# Altium PCB Jump Starter.PcbDoc (part 2 of 2)
Units mm, origin at the board's own origin, x right, y up, seen from the top; angles counter-clockwise.
Board outline 188.98 x 144.65 mm, 2 copper layers (Top Layer, Bottom Layer), stack 1.671 mm thick; 96 components, 60 nets, 320 pads, 764 vias.
Unrouted connection lines stored in the file: 5.
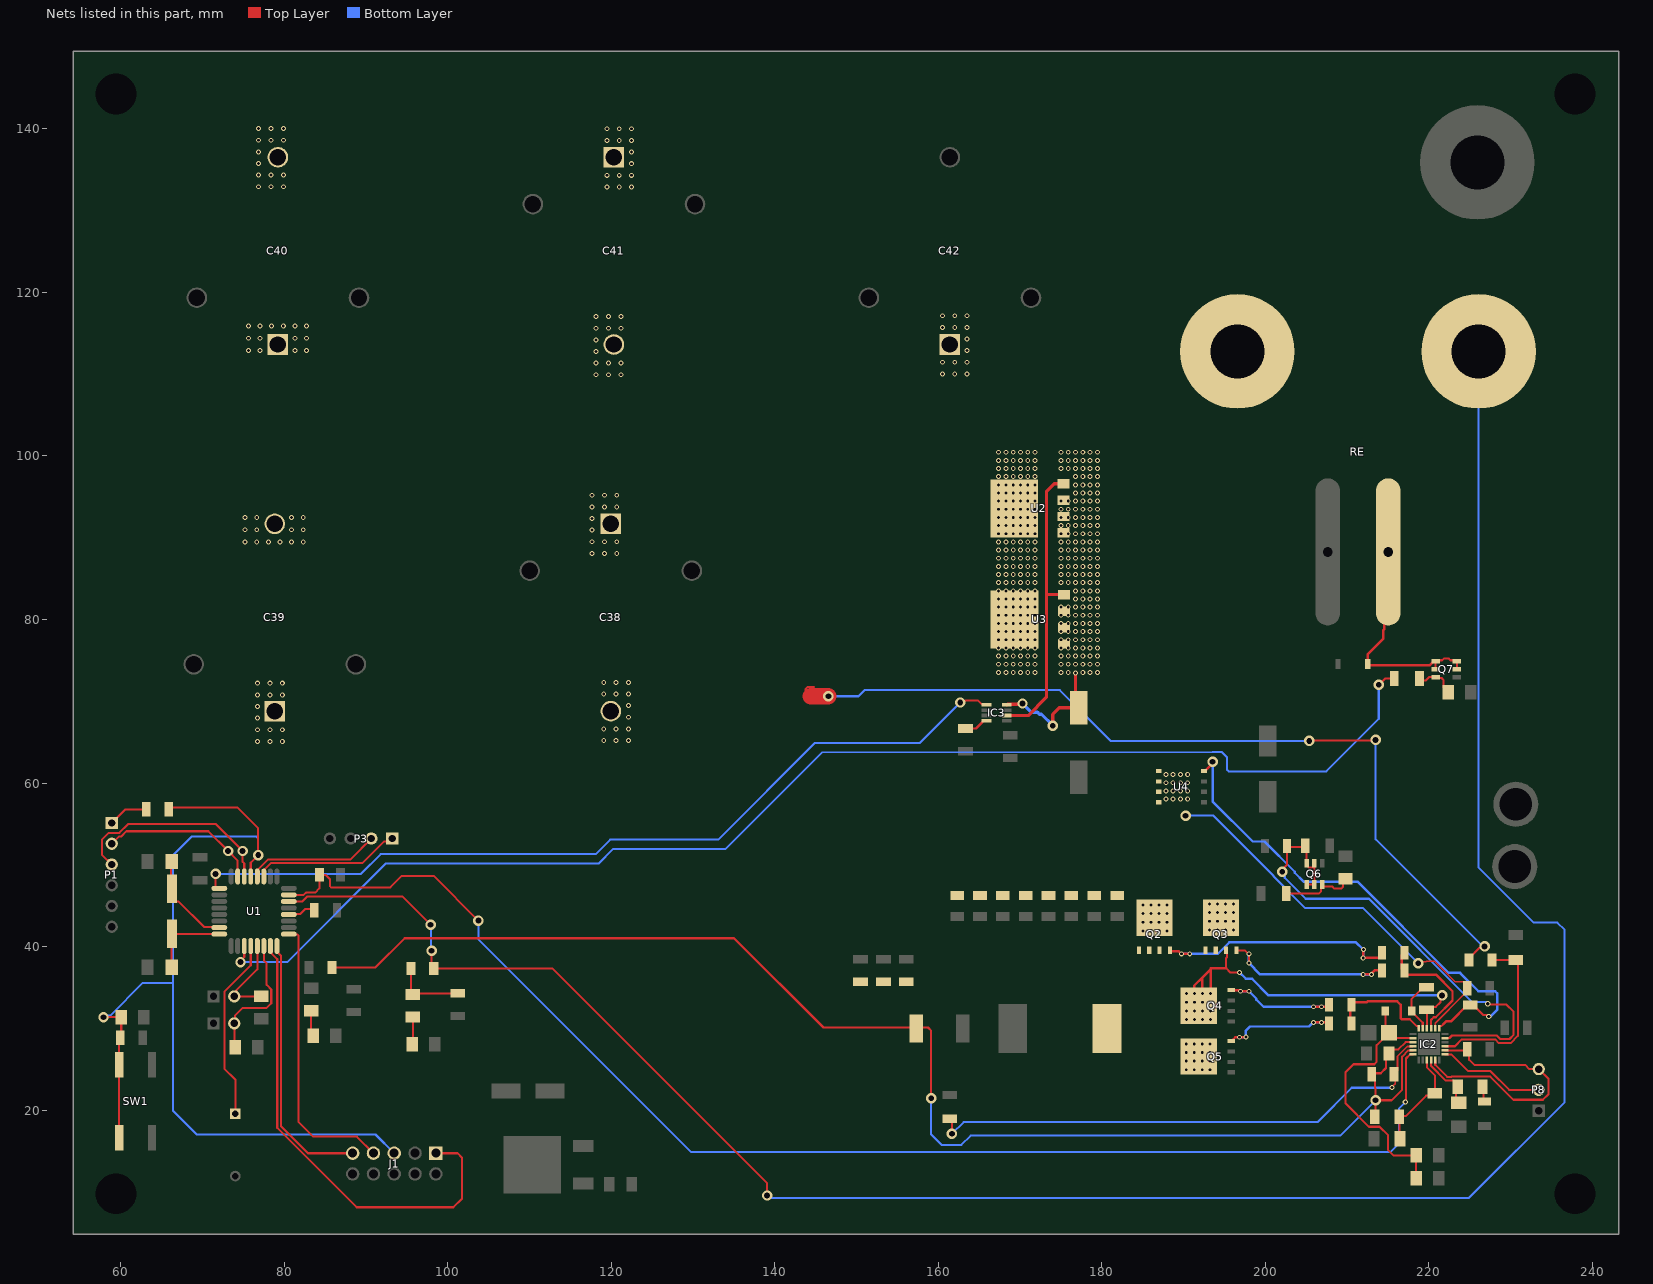
[diagram p2: the nets of this part, all layers, seen from the top]

## Via types
v1: diameter 0.6, hole 0.35, Top Layer to Bottom Layer, 576 vias
v2: diameter 0.6, hole 0.35, Top Layer to Bottom Layer, tented both sides, 128 vias
v3: diameter 1.27, hole 0.711, Top Layer to Bottom Layer, 53 vias
v4: diameter 0.65, hole 0.4, Top Layer to Bottom Layer, 7 vias

## Nets (pads, with @x,y where several pads share a name; then routed paths per layer and width w, separated by ;. In a path a pad name is that pad's centre, name@x,y a point inside that pad or via, vN(x,y) a via of type N, cw(c..) or ccw(c..) an arc to the next point about the centre after c; other vN are vias at no path point) (continued)
ISMON: C15.2 IC2.6 U1.23 | length 167
  Top Layer w0.254: U1.23@80.577,46.323 82.394,46.323 82.676,46.605 83.81,46.605 84.322,47.117 C15.2@84.322,48.768 84.338,48.751 85.107,48.751 85.598,48.26 85.598,47.393 85.747,47.244 92.996,47.244 94.393,48.641 98.298,48.641 v3(103.759,43.18) ; v4(217.124,20.988) 217.194,21.058 217.194,26.313 217.671,26.79 218.036,26.79 IC2.6@218.059,26.813
  Bottom Layer w0.254: v3(103.759,43.18) 103.759,40.894 129.794,14.859 215.265,14.859 216.358,15.952 216.358,20.209 217.124,20.976 v4(217.124,20.988)
MISO: J1.9 U1.16 | length 32.4
  Top Layer w0.254: U1.16@79.127,40.073 79.127,39.398 79.629,38.896 79.629,18.034 82.931,14.732 J1.9@88.392,14.732
MOSFET_GATE: IC3.6 U2.4 U3.4 | length 35.6
  Top Layer w0.254: 170.989,68.255 170.994,68.251
  Top Layer w0.4: IC3.6@168.382,68.255 170.989,68.255 ; 170.994,68.251 173.228,70.485 173.228,83.058 ; U2.4@175.336,96.599 174.196,96.599 173.228,95.631 173.228,83.058 ; U3.4@175.374,83.01 175.326,83.058 173.228,83.058
MOSFET_GATE_DRIVER: IC3.1 U1.1 | length 105.4
  Top Layer w0.254: v3(71.628,48.895) 71.628,47.283 71.788,47.123 U1.1@72.077,47.123 ; v3(162.687,69.85) 162.881,70.044 163.284,70.044 163.344,70.104 164.846,70.104 165.297,69.653 165.784,69.653 IC3.1@165.882,69.555
  Bottom Layer w0.254: v3(71.628,48.895) 89.408,48.895 91.821,51.308 118.11,51.308 119.888,53.086 133.096,53.086 144.907,64.897 155.216,64.897 155.321,64.897 157.734,64.897 v3(162.687,69.85)
MOSI: J1.1 U1.15 | length 58.1
  Top Layer w0.254: U1.15@78.327,40.073 78.327,39.304 78.49,39.141 78.49,39.134 79.165,38.459 79.165,17.842 88.879,8.128 100.711,8.128 101.758,9.175 101.758,14.193 101.219,14.732 J1.1@98.552,14.732
NetC2_1: C2.1 U1.20 | length 3.5
  Top Layer w0.254: U1.20@80.577,43.923 80.704,43.923 80.77,43.989 81.977,43.989 82.565,44.577 83.583,44.577 C2.1@83.71,44.45
NetC3_2: C3.2 U1.7 Y1.2 | length 11.8
  Top Layer w0.254: C3.2@66.246,50.419 66.167,50.34 66.167,47.2 Y1.2@66.294,47.073 66.294,45.979 66.767,45.506 67.108,45.506 70.225,42.389 72.011,42.389 U1.7@72.077,42.323
NetC4_2: C4.2 U1.8 Y1.1 | length 9.9
  Top Layer w0.254: C4.2@66.246,37.465 66.246,41.525 Y1.1@66.294,41.573 66.344,41.523 U1.8@72.077,41.523
NetC8_2: C8.2 P1.1 | length 4.9
  Top Layer w0.254: P1.1@58.928,55.118 60.579,56.769 C8.2@63.136,56.769
NetC9_2: C9.2 IC2.4 R27.2 | length 64.8
  Top Layer w0.203: R27.2@161.417,18.957 161.671,18.703 v3(161.671,17.105) ; v4(215.49,22.762) 215.49,22.831 215.9,23.241 215.9,24.22 C9.2@215.736,24.384 216.154,24.802 216.154,26.58 217.349,27.775 218.021,27.775 IC2.4@218.059,27.813
  Bottom Layer w0.254: v3(161.671,17.105) 163.108,18.542 206.375,18.542 210.566,22.733 215.46,22.733 v4(215.49,22.762)
NetC13_1: C13.1 IC2.10 R9.1 | length 7.3
  Top Layer w0.254: IC2.10@220.259,26.113 220.272,26.1 220.272,25.392 222.054,23.61 223.021,23.61 223.519,23.112 R9.1@223.519,22.86 223.319,22.66 223.319,21.235 C13.1@223.647,20.907
NetC14_1: C14.1 R9.2 | length 2
  Top Layer w0.254: R9.2@226.569,22.86 226.695,22.734 226.695,21.085 C14.1@226.822,20.958
NetC16_1: C16.1 IC2.9 R12.2 R13.1 | length 12.7
  Top Layer w0.254: R12.2@216.459,16.51 216.383,16.586 R13.1@216.383,19.177 216.472,19.266 217.153,19.266 219.661,21.774 220.423,21.774 C16.1@220.726,22.077 220.726,24.257 219.79,25.193 219.79,25.487 219.764,25.513 219.764,26.108 IC2.9@219.759,26.113
NetC18_1: C18.1 IC2.19 U4.4 | length 62.5
  Top Layer w0.254: IC2.19@221.259,30.013 221.259,30.288 221.282,30.311 221.557,30.311 221.771,30.525 ; C18.1@224.684,32.856 C18.1@225.044,32.856 225.404,32.856 226.612,31.648 227.113,31.648 v4(227.308,31.453)
  Top Layer w0.3: U4.4@192.508,61.468 192.61,61.468 193.354,62.212 193.354,62.544 193.421,62.611 v3(193.548,62.611) ; 221.771,30.525 222.107,30.861 222.689,30.861 C18.1@224.684,32.856
  Bottom Layer w0.3: v3(193.548,62.611) 193.548,57.755 198.454,52.849 199.892,52.849 203.589,49.152 203.589,49.025 204.671,47.943 211.266,47.943 222.424,36.784 223.82,36.784 226.06,34.544 228.092,34.544 228.346,34.29 228.346,32.258 227.541,31.453 v4(227.308,31.453)
NetC21_1: C21.1 D2.1 IC2.23 | length 6.4
  Top Layer w0.254: IC2.23@219.246,30.226 219.246,30.686 217.881,32.051 D2.1@217.881,32.131 217.881,33.601 219.325,35.045 C21.1@219.71,35.045
NetC21_2: C21.2 IC2.22 L1.1 Q2.1 Q2.2 Q2.3 Q3.1 Q3.2 Q3.3 Q4.5-6-7-8 Q5.5-6-7-8 | length 47.3
  Top Layer w0.254: Q3.3@195.199,39.553 195.322,39.43 195.322,38.713 195.326,38.709 195.199,38.582 195.199,37.338 195.707,36.83 ; IC2.22@219.759,30.026 219.759,32.216 C21.2@219.71,32.265 220.078,32.633 220.847,32.633 221.421,33.207 221.421,33.842 v3(221.615,34.036)
  Top Layer w0.3: Q4.5-6-7-8@191.3,33.275 191.347,33.228 v1(191.347,33.189) 191.77,32.766 Q4.5-6-7-8@191.871,32.766 ; Q4.5-6-7-8@191.3,34.165 191.3,35.225 192.297,36.222 ; Q4.5-6-7-8@192.297,34.165 192.297,36.222 ; Q4.5-6-7-8@193.294,34.165 193.294,37.373 ; 193.412,37.338 192.297,36.222 ; 193.412,37.373 195.199,37.373 ; 195.707,36.83 v1(196.85,36.83)
  Bottom Layer w0.3: v1(196.85,36.83) 197.612,36.068 198.374,36.068 200.406,34.036 v3(221.615,34.036)
  other v1: 190.331,24.934 191.304,24.934 192.278,24.934 193.252,24.934 190.331,25.993 191.304,25.993 192.278,25.993 193.252,25.993 190.331,27.051 191.304,27.051 192.278,27.051 193.252,27.051 190.331,28.109 191.304,28.109 192.278,28.109 193.252,28.109 190.373,31.073 191.347,31.073 192.32,31.073 193.294,31.073 190.373,32.131 191.347,32.131 192.32,32.131 193.294,32.131 190.373,33.189 192.32,33.189 193.294,33.189 190.373,34.248 191.347,34.248 192.32,34.248 193.294,34.248
NetC23_1: C23.1 R21.2 R22.1 | length 8.8
  Top Layer w0.254: R21.2@95.504,37.338 95.504,34.396 R22.1@95.758,34.142 95.889,34.273 C23.1@101.219,34.273
NetC38_2: C38.2 C39.1
  other v1: 76.758,65.098 78.271,65.098 79.784,65.098 119.098,65.204 120.611,65.204 122.124,65.204 76.758,66.521 78.271,66.521 79.784,66.521 119.098,66.626 120.611,66.626 122.124,66.626 76.758,67.943 122.124,68.049 76.758,69.365 122.124,69.471 76.758,70.788 78.271,70.788 79.784,70.788 119.098,70.893 120.611,70.893 122.124,70.893 76.758,72.21 78.271,72.21 79.784,72.21 119.098,72.316 120.611,72.316 122.124,72.316
NetC39_2: C39.2 C40.1
  other v1: 75.237,89.458 76.659,89.458 78.082,89.458 79.504,89.458 80.926,89.458 82.349,89.458 75.237,90.971 76.659,90.971 80.926,90.971 82.349,90.971 75.237,92.484 76.659,92.484 80.926,92.484 82.349,92.484 75.639,112.875 77.062,112.875 81.329,112.875 82.751,112.875 75.639,114.388 77.062,114.388 81.329,114.388 82.751,114.388 75.639,115.901 77.062,115.901 78.484,115.901 79.906,115.901 81.329,115.901 82.751,115.901
NetC40_2: C40.2 C41.1
  other v1: 119.479,132.895 120.992,132.895 122.505,132.895 76.885,132.916 78.398,132.916 79.911,132.916 119.479,134.317 120.992,134.317 122.505,134.317 76.885,134.339 78.398,134.339 79.911,134.339 122.505,135.74 76.885,135.761 122.505,137.162 76.885,137.183 119.479,138.584 120.992,138.584 122.505,138.584 76.885,138.606 78.398,138.606 79.911,138.606 119.479,140.007 120.992,140.007 122.505,140.007 76.885,140.028 78.398,140.028 79.911,140.028
NetC41_2: C41.2 C42.1
  other v1: 118.16,109.929 119.673,109.929 121.186,109.929 160.5,110.035 162.013,110.035 163.526,110.035 118.16,111.352 119.673,111.352 121.186,111.352 160.5,111.457 162.013,111.457 163.526,111.457 118.16,112.774 163.526,112.88 118.16,114.196 163.526,114.302 118.16,115.619 119.673,115.619 121.186,115.619 160.5,115.724 162.013,115.724 163.526,115.724 118.16,117.041 119.673,117.041 121.186,117.041 160.5,117.147 162.013,117.147 163.526,117.147
NetC46_2: C46.2 IC3.4 | length 3
  Top Layer w0.254: C46.2@163.322,66.668 164.613,66.668 165.409,67.464 165.409,67.507 165.507,67.605 IC3.4@165.882,67.605
NetD1_2: D1.2 Q7.1 Q7.2 Q7.5 Q7.6 RE.1 | length 28.2
  Top Layer w0.254: Q7.2@220.823,73.914 Q7.1@220.823,74.864 220.971,75.012 221.623,75.012 221.856,75.245 222.39,75.245 222.623,75.012 223.275,75.012 Q7.6@223.423,74.864 Q7.5@223.423,73.914
  Top Layer w0.3: RE.1@215.028,88.265 214.543,87.78 214.543,78.815 214.393,78.665 214.393,77.614 212.538,75.759 212.538,74.569 D1.2@212.518,74.549 212.518,74.422 220.131,74.422 220.573,74.864 Q7.1@220.823,74.864
NetIC2_13: IC2.13 P8.2 | length 13.3
  Top Layer w0.254: IC2.13@221.959,26.813 222.742,26.813 224.79,24.765 227.529,24.765 229.815,22.479 P8.2@233.426,22.479
NetIC2_15: IC2.15 R5.1 R6.1 | length 22.1
  Top Layer w0.254: IC2.15@221.959,27.813 223.184,27.813 224.03,28.659 228.09,28.659 228.555,28.194 230.007,28.194 230.886,29.073 230.886,38.099 R6.1@230.632,38.353 R6.1@230.632,38.353 R5.1@227.711,38.354
NetIC2_17: IC2.17 Q6.1 Q6.2 Q6.5 Q6.6 R7.2 R8.1 | length 60.1
  Top Layer w0.254: v3(202.057,49.149) 202.057,49.41 202.645,49.998 R7.2@202.645,52.324 ; R7.2@202.645,52.197 R8.1@204.748,52.197 ; R8.1@204.978,52.197 205.044,52.131 205.044,49.945 205.302,49.687 Q6.5@205.994,49.687 ; Q6.1@205.044,47.595 Q6.2@205.994,47.595 Q6.5@205.994,49.687 ; Q6.5@205.994,50.195 Q6.5@205.994,49.687 ; IC2.17@221.959,28.813 221.972,28.826 222.524,28.826 222.821,29.123 228.282,29.123 228.703,28.702 229.859,28.702 230.353,29.196 230.353,32.029 229.489,32.893 227.333,32.893 v4(227.203,33.023) ; R8.1@204.748,52.197 R8.1@204.875,52.324 R8.1@204.748,52.197
  Bottom Layer w0.254: v3(202.057,49.149) 202.057,48.874 202.368,48.563 202.368,48.404 204.926,45.847 212.673,45.847 225.318,33.202 227.025,33.202 v4(227.203,33.023)
NetIC2_21: IC2.21 R16.1 R17.2 | length 15.9
  Top Layer w0.254: IC2.21@220.259,30.013 220.259,31.029 220.588,31.358
  Top Layer w0.3: R17.2@216.957,37.02 R17.2@216.696,37.282 ; R16.1@217.021,39.243 216.696,38.918 R17.2@216.696,37.282 ; 220.588,31.358 220.842,31.358 222.885,33.401 222.885,34.544 220.853,36.576 217.346,36.576 217.021,36.901 R17.2@217.021,37.084 ; R17.2@216.696,37.282 R17.2@216.823,37.282 ; R17.2@216.823,37.282 R17.2@217.021,37.084 ; R17.2@216.823,37.282 R17.2@217.021,37.084
NetIC2_24: IC2.24 R14.2 R15.1 | length 13.5
  Top Layer w0.254: 217.657,31.115 218.461,30.311 218.736,30.311 218.759,30.288 IC2.24@218.759,30.013
  Top Layer w0.3: R15.1@210.368,30.275 210.368,32.717 R14.2@210.544,32.893 ; R14.2@210.547,32.89 210.869,33.212 212.424,33.212 212.508,33.296 216.132,33.296 216.535,32.893 216.535,31.264 216.684,31.115 217.657,31.115
NetQ2_4: Q2.4 R16.2 | length 30.6
  Top Layer w0.3: Q2.4@188.341,39.553 188.341,39.52 188.441,39.42 189.412,39.42 189.717,39.116 v1(190.754,39.116) ; v1(211.963,38.608) v1@211.979,38.624 ; v1(211.995,39.624) 211.979,39.608 v1@211.979,38.624 ; R16.2@214.271,39.243 214.271,38.933 213.946,38.608 211.995,38.608 v1@211.979,38.624
  Bottom Layer w0.3: v1(189.738,39.116) 194.183,39.116 195.58,40.513 211.074,40.513 v1@211.979,39.608 ; v1(211.963,38.608) 211.979,38.624 v1@211.979,39.608 ; v1(211.995,39.624) v1@211.979,39.608
NetQ3_4: Q3.4 R17.1 | length 21.8
  Top Layer w0.254: Q3.4@196.469,39.553 196.52,39.502 196.596,39.502 197.527,39.502 197.913,39.116 v1(197.993,39.116) v1(197.993,37.973)
  Top Layer w0.3: v1(211.963,36.608) 211.979,36.592 212.963,36.592 v1(212.979,36.576) 213.036,36.633 213.036,36.774 213.346,37.084 R17.1@214.271,37.084
  Bottom Layer w0.3: v1(197.993,39.116) v1(197.993,37.973) 199.358,36.608 211.931,36.608 211.963,36.576 212.598,36.576
NetQ4_4: Q4.4 R14.1 | length 15.1
  Top Layer w0.3: Q4.4@195.834,34.671 196.769,34.671 196.896,34.544 196.953,34.601 197.011,34.544 v1(197.993,34.544) ; v1(205.867,32.639) 207.54,32.639 R14.1@207.794,32.893
  Bottom Layer w0.3: v1(196.977,34.544) v1(197.993,34.544) 198.911,33.626 198.911,33.499 199.771,32.639 v1(205.867,32.639) v1(206.883,32.639)
NetQ5_4: Q5.4 R15.2 | length 15.2
  Top Layer w0.3: Q5.4@195.834,28.448 195.92,28.448 196.02,28.548 196.02,28.609 196.322,28.911 196.921,28.911 196.944,28.933 197.589,28.933 v1(197.612,28.956) ; v1(205.867,30.734) 207.667,30.734 R15.2@207.794,30.607
  Bottom Layer w0.3: v1(196.856,28.911) 196.879,28.933 197.589,28.933 v1(197.612,28.956) 197.612,29.718 198.12,30.226 205.338,30.226 205.846,30.734 v1(206.883,30.734)
NetQ6_3: Q6.3 R3.2 R4.1 | length 9.3
  Top Layer w0.254: R3.2@202.565,46.482 206.551,46.482 206.796,46.727 206.796,47.447 Q6.3@206.944,47.595 206.944,47.493 207.092,47.345 208.179,47.345 208.437,47.087 209.266,47.087 209.499,47.32 209.499,47.976 R4.1@209.804,48.281
NetQ7_3: Q7.3 R24.2 R25.1 | length 5.1
  Top Layer w0.254: R24.2@218.847,72.771 219.075,72.543 219.604,72.543 220.025,72.964 Q7.3@220.823,72.964 220.939,72.848 221.538,72.848 221.802,72.584 221.802,71.695 R25.1@222.377,71.12
NetR19_2: R19.2 R20.1 | length 3.2
  Top Layer w0.254: R19.2@83.312,32.131 83.312,29.331 R20.1@83.56,29.083
NetR22_2: R22.2 R23.1 | length 3.4
  Top Layer w0.254: R23.1@95.652,28.067 95.758,28.173 R22.2@95.758,31.39
RELAY_IN: C48.1 IC3.8 RE.2 U2.1 U2.2 U2.3 U3.1 U3.2 U3.3 | length 16.2
  Top Layer w0.4: IC3.8@168.382,69.555 168.466,69.639 170.223,69.639 v3(170.307,69.723) ; v3(173.99,66.997) 173.99,68.394 174.811,69.215 C48.1@177.165,69.215 176.784,69.596 v1(176.784,73.474)
  Bottom Layer w0.4: v3(170.307,69.723) 171.381,68.649 172.143,68.649 172.369,68.423 172.623,68.423 173.99,67.056 v3(173.99,66.997)
  other v1: 175.006,73.533 175.896,73.533 177.675,73.533 178.564,73.533 179.453,73.533 175.006,74.53 175.896,74.53 176.785,74.53 177.675,74.53 178.564,74.53 179.453,74.53 175.006,75.527 175.896,75.527 176.785,75.527 177.675,75.527 178.564,75.527 179.453,75.527 175.006,76.525 175.896,76.525 176.785,76.525 177.675,76.525 178.564,76.525 179.453,76.525 175.006,77.522 175.896,77.522 176.785,77.522 177.675,77.522 178.564,77.522 179.453,77.522 175.006,78.519 175.896,78.519 176.785,78.519 177.675,78.519 178.564,78.519 179.453,78.519 175.006,79.516 175.896,79.516 176.785,79.516 177.675,79.516 178.564,79.516 179.453,79.516 175.006,80.513 175.896,80.513 176.785,80.513 177.675,80.513 178.564,80.513 179.453,80.513 175.006,81.51 175.896,81.51 176.785,81.51 177.675,81.51 178.564,81.51 179.453,81.51 176.785,82.508 177.675,82.508 178.564,82.508 179.453,82.508 176.785,83.505 177.675,83.505 178.564,83.505 179.453,83.505 175.006,84.502 175.896,84.502 176.785,84.502 177.675,84.502 178.564,84.502 179.453,84.502 175.006,85.499 175.896,85.499 176.785,85.499 177.675,85.499 178.564,85.499 179.453,85.499 175.006,86.496 175.896,86.496 176.785,86.496 177.675,86.496 178.564,86.496 179.453,86.496 175.006,87.494 175.896,87.494 176.785,87.494 177.675,87.494 178.564,87.494 179.453,87.494 175.006,88.491 175.896,88.491 176.785,88.491 177.675,88.491 178.564,88.491 179.453,88.491 175.006,89.488 175.896,89.488 176.785,89.488 177.675,89.488 178.564,89.488 179.453,89.488 175.006,90.485 175.896,90.485 176.785,90.485 177.675,90.485 178.564,90.485 179.453,90.485 175.006,91.482 175.896,91.482 176.785,91.482 177.675,91.482 178.564,91.482 179.453,91.482 175.006,92.479 175.896,92.479 176.785,92.479 177.675,92.479 178.564,92.479 179.453,92.479 175.006,93.477 175.896,93.477 176.785,93.477 177.675,93.477 178.564,93.477 179.453,93.477 175.006,94.474 175.896,94.474 176.785,94.474 177.675,94.474 178.564,94.474 179.453,94.474 176.785,95.471 177.675,95.471 178.564,95.471 179.453,95.471 176.785,96.468 177.675,96.468 178.564,96.468 179.453,96.468 176.785,97.465 177.675,97.465 178.564,97.465 179.453,97.465 175.006,98.463 175.896,98.463 176.785,98.463 177.675,98.463 178.564,98.463 179.453,98.463 175.006,99.46 175.896,99.46 176.785,99.46 177.675,99.46 178.564,99.46 179.453,99.46 175.006,100.457 175.896,100.457 176.785,100.457 177.675,100.457 178.564,100.457 179.453,100.457
RELAY_OUT: R21.1 RE.3 U1.22 | length 278
  Top Layer w0.254: U1.22@80.577,45.523 82.25,45.523 82.868,46.141 94.448,46.141 v3(97.917,42.672) ; v3(98.044,39.497) 98.044,37.592 R21.1@98.298,37.338 112.776,37.338 139.065,11.049 v3(139.065,9.563)
  Bottom Layer w0.254: v3(97.917,42.672) 97.98,42.608 97.98,39.56 v3(98.044,39.497) ; v3(139.065,9.563) 139.332,9.563 139.624,9.271 224.904,9.271 236.601,20.968 236.601,42.037 235.712,42.926 232.811,42.926 226.078,49.659 RE.3@226.078,112.776
RESET: C7.1 C8.1 J1.5 R1.2 SW1.1 SW1.2 U1.29 | length 119.6
  Top Layer w0.254: v3(57.912,31.369) R1.2@60.092,31.369 60.088,31.365 60.088,28.956 59.817,28.685 59.817,25.564 SW1.2@59.849,25.532 59.817,25.5 59.817,16.664 SW1.1@59.849,16.632 ; C8.1@65.896,56.769 66.15,57.023 74.295,57.023 76.835,54.483 v3(76.835,51.181) 75.927,50.273 U1.29@75.927,48.573
  Bottom Layer w0.254: v3(57.912,31.369) 58.106,31.563 58.741,31.563 62.738,35.56 66.421,35.56 ; v3(76.835,51.181) 76.835,53.213 76.581,53.467 68.707,53.467 66.421,51.181 66.421,35.56 ; J1.5@93.472,14.732 91.186,17.018 69.342,17.018 66.421,19.939 66.421,35.56
RX: P1.3 U1.30 | length 26.1
  Top Layer w0.254: P1.3@58.928,50.038 57.721,51.245 57.721,53.078 58.554,53.911 59.867,53.911 60.947,54.991 71.628,54.991 v3(74.93,51.689) 74.93,50.379 75.127,50.182 U1.30@75.127,48.573
SCK: J1.7 U1.17 | length 34.8
  Top Layer w0.254: U1.17@80.577,41.523 80.548,41.494 80.584,41.457 81.639,41.457 81.788,41.308 81.788,18.542 83.566,16.764 88.9,16.764 J1.7@90.932,14.732
SCL: P3.2 U1.28 | length 16.3
  Top Layer w0.254: U1.28@76.727,48.573 76.727,49.342 76.89,49.505 76.89,49.512 78.05,50.672 88.137,50.672 P3.2@90.678,53.213
SDA: P3.1 U1.27 | length 18.1
  Top Layer w0.254: U1.27@77.527,48.573 77.527,49.342 77.69,49.505 77.69,49.512 78.386,50.208 89.578,50.208 92.236,52.866 92.871,52.866 P3.1@93.218,53.213
SPEAKER_IN: LS1.1 U1.12 | length 22.4
  Top Layer w0.254: LS1.1@74.041,19.538 74.041,23.749 72.707,25.083 72.707,34.481 75.927,37.701 U1.12@75.927,40.073
STARTER_EN: R24.1 U1.11 | length 162.9
  Top Layer w0.254: v3(74.676,38.1) 74.676,38.267 75.127,38.718 U1.11@75.127,40.073 ; v3(213.868,72.009) 214.63,72.771 R24.1@215.747,72.771
  Bottom Layer w0.254: v3(74.676,38.1) 80.391,38.1 92.456,50.165 118.491,50.165 120.269,51.943 133.731,51.943 133.753,51.921 133.963,51.921 145.695,63.653 145.77,63.728 193.547,63.793 193.552,63.799 194.646,63.799 195.326,63.119 195.326,61.616 195.52,61.422 207.45,61.422 213.868,67.84 v3(213.868,72.009)
TX: P1.2 U1.31 | length 19.5
  Top Layer w0.254: P1.2@58.928,52.578 59.797,53.447 60.059,53.447 60.714,54.102 70.739,54.102 v3(73.152,51.689) 74.327,50.514 U1.31@74.327,48.573
UI_BUTTON_1: P2.2 R2.1 U1.13 | length 10.6
  Top Layer w0.254: U1.13@76.727,40.073 76.727,37.23 74.152,34.655 74.152,34.147 P2.2@73.914,33.909 R2.1@77.216,33.909
UI_BUTTON_2: P9.2 R36.1 U1.14 | length 16.4
  Top Layer w0.254: R36.1@74.041,27.686 73.914,27.813 P9.2@73.914,30.607 74.007,30.7 74.007,31.589 74.93,32.512 77.877,32.512 78.432,33.068 78.432,34.75 77.863,35.32 77.863,37.961 77.527,38.297 U1.14@77.527,40.073
VCC: C12.1 D2.2 IC2.2 R10.1 R11.1 | length 33.5
  Top Layer w0.254: D2.2@214.681,32.131 214.681,29.927 C12.1@215.144,29.464 ; IC2.2@218.059,28.813 215.795,28.813 C12.1@215.144,29.464 ; R10.1@218.44,11.684 R11.1@218.44,14.478 215.646,14.478 215.011,15.113 215.011,16.91 213.957,17.964 212.662,17.964 209.804,20.821 209.804,24.638 210.777,25.611 213.317,25.611 213.614,25.908 213.614,27.934 214.294,28.614 214.294,28.638 215.12,29.464 C12.1@215.144,29.464
VIN: C20.2 C24.1 C25.1 C26.1 C27.1 C28.1 C29.1 C30.1 C31.1 IC2.20 Q2.5-6-7-8 Q3.5-6-7-8 U4.5 U4.6 U4.7 U4.8 | length 50.2
  Top Layer w0.203: v3(218.694,37.973) 218.846,38.125 219.634,38.125 219.736,38.227 220.67,38.227 223.184,35.713 224.272,35.713 224.68,35.305 C20.2@224.68,34.925 224.272,34.517 224.272,34.135 220.759,30.622 IC2.20@220.759,30.013
  Bottom Layer w0.254: v3(190.246,56.007) 193.653,56.007 200.995,48.665 200.995,48.582 204.873,44.704 211.963,44.704 v3(218.694,37.973)
  other v1: 185.039,41.91 186.013,41.91 186.986,41.91 187.96,41.91 193.167,42.037 194.141,42.037 195.114,42.037 196.088,42.037 185.039,42.968 186.013,42.968 186.986,42.968 187.96,42.968 193.167,43.095 194.141,43.095 195.114,43.095 196.088,43.095 185.039,44.027 186.013,44.027 186.986,44.027 187.96,44.027 193.167,44.154 194.141,44.154 195.114,44.154 196.088,44.154 185.039,45.085 186.013,45.085 186.986,45.085 187.96,45.085 193.167,45.212 194.141,45.212 195.114,45.212 196.088,45.212 187.833,58.039 188.723,58.039 189.612,58.039 190.502,58.039 187.833,59.036 188.723,59.036 189.612,59.036 190.502,59.036 187.833,60.033 188.723,60.033 189.612,60.033 190.502,60.033 187.833,61.031 188.723,61.031 189.612,61.031 190.502,61.031
VOUT: C9.1 C11.1 C38.1 C43.1 C44.1 C45.1 IC2.3 IC2.5 R5.2 R13.2 R18.1 R26.2 U2.5 U3.5 | length 279.7
  Top Layer w0.254: R18.1@85.852,37.465 91.186,37.465 94.742,41.021 135.001,41.021 135.023,41.043 145.967,30.099 157.17,30.099 R26.2@157.297,29.972 ; 143.891,71.12 143.742,71.269 143.742,71.479 144.018,71.755 144.78,71.755 ; R26.2@157.297,30.099 158.75,30.099 159.131,29.718 v3(159.131,21.463) ; v3(205.359,65.151) 205.422,65.215 213.423,65.215 v3(213.487,65.278) ; R13.2@213.385,19.177 213.487,19.279 v3(213.487,21.209) ; IC2.5@218.059,27.313 218.046,27.3 217.494,27.3 216.73,26.536 216.73,22.501 215.438,21.209 v3(213.487,21.209) ; IC2.3@218.059,28.313 217.154,28.313 216.263,27.422 215.643,27.422 215.131,26.91 C11.1@215.117,26.924 214.757,26.564 214.757,25.146 214.122,24.511 213.143,24.511 C9.1@213.016,24.384 213.419,23.981 213.419,22.684 213.487,22.616 v3(213.487,21.209) ; R5.2@224.917,38.354 224.917,38.595 226.153,39.831 226.62,39.831 v3(226.814,40.026)
  Top Layer w0.4: 143.891,71.12 144.399,70.612
  Top Layer w2: 144.399,70.612 v3(146.558,70.612)
  Bottom Layer w0.254: v3(146.558,70.612) 150.241,70.612 151.003,71.374 174.836,71.374 174.991,71.219 181.059,65.151 v3(205.359,65.151) ; v3(159.131,21.463) 159.131,17.018 160.401,15.748 162.814,15.748 163.957,16.891 209.169,16.891 v3(213.487,21.209) ; v3(213.487,65.278) 213.487,53.107 226.568,40.026 v3(226.814,40.026)
  other v1: 167.386,73.533 168.276,73.533 169.165,73.533 170.055,73.533 170.944,73.533 171.833,73.533 167.386,74.53 168.276,74.53 169.165,74.53 170.055,74.53 170.944,74.53 171.833,74.53 167.386,75.527 168.276,75.527 169.165,75.527 170.055,75.527 170.944,75.527 171.833,75.527 167.386,76.525 168.276,76.525 169.165,76.525 170.055,76.525 170.944,76.525 171.833,76.525 167.386,77.522 168.276,77.522 169.165,77.522 170.055,77.522 170.944,77.522 171.833,77.522 167.386,78.519 168.276,78.519 169.165,78.519 170.055,78.519 170.944,78.519 171.833,78.519 167.386,79.516 168.276,79.516 169.165,79.516 170.055,79.516 170.944,79.516 171.833,79.516 167.386,80.513 168.276,80.513 169.165,80.513 170.055,80.513 170.944,80.513 171.833,80.513 167.386,81.51 168.276,81.51 169.165,81.51 170.055,81.51 170.944,81.51 171.833,81.51 167.386,82.508 168.276,82.508 169.165,82.508 170.055,82.508 170.944,82.508 171.833,82.508 167.386,83.505 168.276,83.505 169.165,83.505 170.055,83.505 170.944,83.505 171.833,83.505 167.386,84.502 168.276,84.502 169.165,84.502 170.055,84.502 170.944,84.502 171.833,84.502 167.386,85.499 168.276,85.499 169.165,85.499 170.055,85.499 170.944,85.499 171.833,85.499 167.386,86.496 168.276,86.496 169.165,86.496 170.055,86.496 170.944,86.496 171.833,86.496 167.386,87.494 168.276,87.494 169.165,87.494 170.055,87.494 170.944,87.494 171.833,87.494 117.652,88.085 119.165,88.085 120.678,88.085 167.386,88.491 168.276,88.491 169.165,88.491 170.055,88.491 170.944,88.491 171.833,88.491 167.386,89.488 168.276,89.488 169.165,89.488 170.055,89.488 170.944,89.488 171.833,89.488 117.652,89.508 119.165,89.508 120.678,89.508 167.386,90.485 168.276,90.485 169.165,90.485 170.055,90.485 170.944,90.485 171.833,90.485 117.652,90.93 167.386,91.482 168.276,91.482 169.165,91.482 170.055,91.482 170.944,91.482 171.833,91.482 117.652,92.352 167.386,92.479 168.276,92.479 169.165,92.479 170.055,92.479 170.944,92.479 171.833,92.479 167.386,93.477 168.276,93.477 169.165,93.477 170.055,93.477 170.944,93.477 171.833,93.477 117.652,93.775 119.165,93.775 120.678,93.775 167.386,94.474 168.276,94.474 169.165,94.474 170.055,94.474 170.944,94.474 171.833,94.474 117.652,95.197 119.165,95.197 120.678,95.197 167.386,95.471 168.276,95.471 169.165,95.471 170.055,95.471 170.944,95.471 171.833,95.471 167.386,96.468 168.276,96.468 169.165,96.468 170.055,96.468 170.944,96.468 171.833,96.468 167.386,97.465 168.276,97.465 169.165,97.465 170.055,97.465 170.944,97.465 171.833,97.465 167.386,98.463 168.276,98.463 169.165,98.463 170.055,98.463 170.944,98.463 171.833,98.463 167.386,99.46 168.276,99.46 169.165,99.46 170.055,99.46 170.944,99.46 171.833,99.46 167.386,100.457 168.276,100.457 169.165,100.457 170.055,100.457 170.944,100.457 171.833,100.457
VREF: C10.1 IC2.11 IC2.14 P8.3 | length 33.2
  Top Layer w0.254: IC2.11@220.759,26.113 220.772,26.1 220.772,25.548 222.246,24.074 222.731,24.074 222.754,24.097 227.511,24.097 230.336,21.272 233.926,21.272 234.633,21.979 234.633,23.812 P8.3@233.426,25.019 232.272,25.019 231.764,25.527 225.552,25.527 224.917,26.162 224.917,27.195 C10.1@224.68,27.432 224.561,27.313 IC2.14@221.959,27.313
pads on no net: C38.3 C38.4 C39.3 C39.4 C40.3 C40.4 C41.3 C41.4 C42.3 C42.4 IC2.12 IC3.3 J1.3 P1.5 P8.1 U1.24 U1.25 U1.26 U1.32

## Polygon pours and split planes (outlines as drawn)
GND on Top Layer "GND_L01_P067" (solid, pour order 67): 54.229,4.826 243.205,4.826 243.205,149.479 54.229,149.479
NetC21_2 on Top Layer "NETC21_2_L01_P010" (solid, pour order 10): 177.546,23.241 178.562,22.225 194.183,22.225 194.183,35.052 195.453,36.322 195.834,36.322 195.834,40.64 195.58,40.894 191.643,40.894 191.389,40.64 191.389,38.481 191.135,38.227 188.595,38.227 187.706,39.116 187.706,40.64 187.452,40.894 183.515,40.894 179.451,36.576 179.07,36.195 178.562,36.195 177.546,35.179
CSP on Top Layer "CSP_L01_P019" (solid, pour order 19): 171.45,24.511 170.434,23.495 163.068,23.495 162.052,24.511 162.052,35.179 163.068,36.195 170.434,36.195 171.45,35.179
DCIN on Top Layer "DCIN_L01_P025" (solid, pour order 25): 198.882,53.975 199.517,53.34 199.517,52.959 200.406,52.959 201.295,53.848 201.295,54.483 201.168,54.61 198.882,54.61
NetC40_2 on Top Layer "NETC40_2_L01_P026" (solid, pour order 26): 72.771,145.415 73.787,146.431 126.365,146.431 127.381,145.415 127.381,127.381 126.365,126.365 73.787,126.365 72.771,127.381
NetC39_2 on Top Layer "NETC39_2_L01_P027" (solid, pour order 27): 89.027,86.614 88.011,85.598 69.85,85.598 68.834,86.614 68.834,120.523 69.85,121.539 88.011,121.539 89.027,120.523
NetC41_2 on Top Layer "NETC41_2_L01_P029" (solid, pour order 29): 169.545,123.444 170.561,122.428 170.561,104.394 169.545,103.378 112.522,103.378 111.506,104.394 111.506,122.428 112.522,123.444
NetC38_2 on Top Layer "NETC38_2_L01_P031" (solid, pour order 31): 72.263,78.74 71.247,77.724 71.247,59.69 72.263,58.674 126.619,58.674 127.635,59.69 127.635,77.724 126.619,78.74
RELAY_IN on Top Layer "RELAY_IN_L01_P035" (solid, pour order 35): 207.899,124.968 208.915,123.952 208.915,101.727 204.216,97.028 204.216,73.533 203.2,72.517 175.514,72.517 174.498,73.533 174.498,100.584 175.514,101.6 179.07,105.156 179.07,123.952 180.086,124.968
VIN on Top Layer "VIN_L01_P036" (solid, pour order 36): 196.723,41.275 197.358,41.91 197.358,51.054 196.342,52.07 194.183,52.07 191.135,55.118 191.135,61.976 190.119,62.992 181.102,62.992 179.959,61.849 179.959,55.372 161.163,55.372 160.147,54.356 160.147,46.101 161.036,45.212 183.261,45.212 183.261,41.783 183.769,41.275
VOUT on Top Layer "Top Layer-VOUT" (solid, pour order 53): 171.577,72.517 172.593,73.533 172.593,100.584 171.577,101.6 112.522,101.6 111.506,100.584 111.506,81.915 112.522,80.899 126.492,80.899 131.318,76.073 131.318,72.563 131.318,24.638 132.461,23.495 157.48,23.495 158.496,24.511 158.496,35.179 157.48,36.195 148.844,36.195 147.828,37.211 147.828,71.416 148.771,72.517
DCIN on Top Layer "DCIN_L01_P055" (solid, pour order 55): 191.897,60.96 191.897,56.134 194.183,53.848 233.934,53.848 234.95,54.864 234.95,59.944 233.934,60.96
+5 on Top Layer "+5_L01_P041" (solid, pour order 41): 119.126,14.224 114.554,14.224 114.554,18.034 113.665,18.923 110.871,18.923 110.871,24.765 111.633,25.527 119.126,25.527
GND on Bottom Layer "GND_L02_P072" (solid, pour order 72): 54.229,4.826 243.205,4.826 243.205,149.479 54.229,149.479
+5 on Bottom Layer "+5_L02_P050" (solid, pour order 50): 55.372,56.388 56.515,57.531 118.364,57.531 119.761,56.134 119.761,7.112 118.491,5.842 56.515,5.842 55.372,6.985
NetC40_2 on Bottom Layer "NETC40_2_L02_P056" (solid, pour order 56): 72.771,145.415 73.787,146.431 126.365,146.431 127.381,145.415 127.381,127.381 126.365,126.365 73.787,126.365 72.771,127.381
NetC39_2 on Bottom Layer "NETC39_2_L02_P057" (solid, pour order 57): 69.85,121.539 88.011,121.539 89.027,120.523 89.027,86.614 88.011,85.598 69.85,85.598 68.834,86.614 68.834,120.523
NetC38_2 on Bottom Layer "NETC38_2_L02_P058" (solid, pour order 58): 71.247,77.724 72.263,78.74 126.619,78.74 127.635,77.724 127.635,59.69 126.619,58.674 72.263,58.674 71.247,59.69
NetC41_2 on Bottom Layer "NETC41_2_L02_P059" (solid, pour order 59): 111.506,122.428 112.522,123.444 169.545,123.444 170.561,122.428 170.561,104.394 169.545,103.378 112.522,103.378 111.506,104.394
RELAY_IN on Bottom Layer "RELAY_IN_L02_P060" (solid, pour order 60): 179.07,123.952 180.086,124.968 207.899,124.968 208.915,123.952 208.915,101.727 204.216,97.028 204.216,73.533 203.2,72.517 175.514,72.517 174.498,73.533 174.498,100.584 175.514,101.6 179.07,105.156
VOUT on Bottom Layer "VOUT_L02_P061" (solid, pour order 61): 111.506,100.584 112.522,101.6 171.577,101.6 172.593,100.584 172.593,73.533 171.577,72.517 131.318,72.517 131.318,76.073 126.492,80.899 112.522,80.899 111.506,81.915
+5 on Bottom Layer "+5_L02_P063" (solid, pour order 63): 119.126,14.224 114.554,14.224 114.554,18.034 113.665,18.923 110.871,18.923 110.871,24.765 111.633,25.527 119.126,25.527

## Other copper
Bottom Layer:
  region net GND: 218.44,29.591 221.488,29.591 221.488,26.543 218.44,26.543

## Silkscreen, mask and mechanical layers (free items; w line width, h text height)
Top Solder:
  region: 179.07,105.156 186.309,105.156 186.309,72.517 175.514,72.517 174.498,73.533 174.498,82.169 176.403,82.169 176.403,83.947 174.498,83.947 174.498,95.758 176.403,95.758 176.403,97.536 174.498,97.536 174.498,100.584
  region: 152.146,101.6 171.577,101.6 172.593,100.584 172.593,73.533 171.577,72.517 152.146,72.517
Bottom Solder:
  region: 217.678,30.48 222.377,30.48 222.377,25.781 222.25,25.781 217.678,25.781
  region: 216.916,123.063 236.093,123.063 236.093,102.743 216.916,102.743
  region: 71.247,77.724 72.263,78.74 126.619,78.74 127.635,77.724 127.635,59.69 126.619,58.674 72.263,58.674 71.247,59.69
  region: 69.85,121.539 88.011,121.539 89.027,120.523 89.027,86.614 88.011,85.598 69.85,85.598 68.834,86.614 68.834,120.523
  region: 72.771,145.415 73.787,146.431 126.365,146.431 127.381,145.415 127.381,127.381 126.365,126.365 73.787,126.365 72.771,127.381
  region: 111.506,122.428 112.522,123.444 169.545,123.444 170.561,122.428 170.561,120.65 170.561,117.856 170.561,104.394 169.545,103.378 112.522,103.378 111.506,104.394
  region: 111.506,100.584 112.522,101.6 171.577,101.6 172.593,100.584 172.593,73.533 171.577,72.517 131.318,72.517 131.318,76.073 126.492,80.899 112.522,80.899 111.506,81.915
  region: 179.07,123.952 180.086,124.968 207.899,124.968 208.915,123.952 208.915,101.727 204.216,97.028 204.216,73.533 203.2,72.517 175.514,72.517 174.498,73.533 174.498,82.042 174.498,83.947 174.498,95.758 174.498,97.536 174.498,100.584 179.07,105.156

## Text inside footprints (layer, text, board x,y; h text height)
U2: Top Overlay "*" at 175.971,88.647 h1.27 r90; Mechanical 13 "*" at 174.32,90.282 h1.27 r90
U3: Top Overlay "*" at 176.009,75.058 h1.27 r90; Mechanical 13 "*" at 174.358,76.693 h1.27 r90